# Altium PCB PCB1.PcbDoc
Units mm, origin at the board's own origin, x right, y up, seen from the top; angles counter-clockwise.
Board outline 74.17 x 27.94 mm, 2 copper layers (Top Layer, Bottom Layer); 12 components, 12 nets, 52 pads, 4 vias.
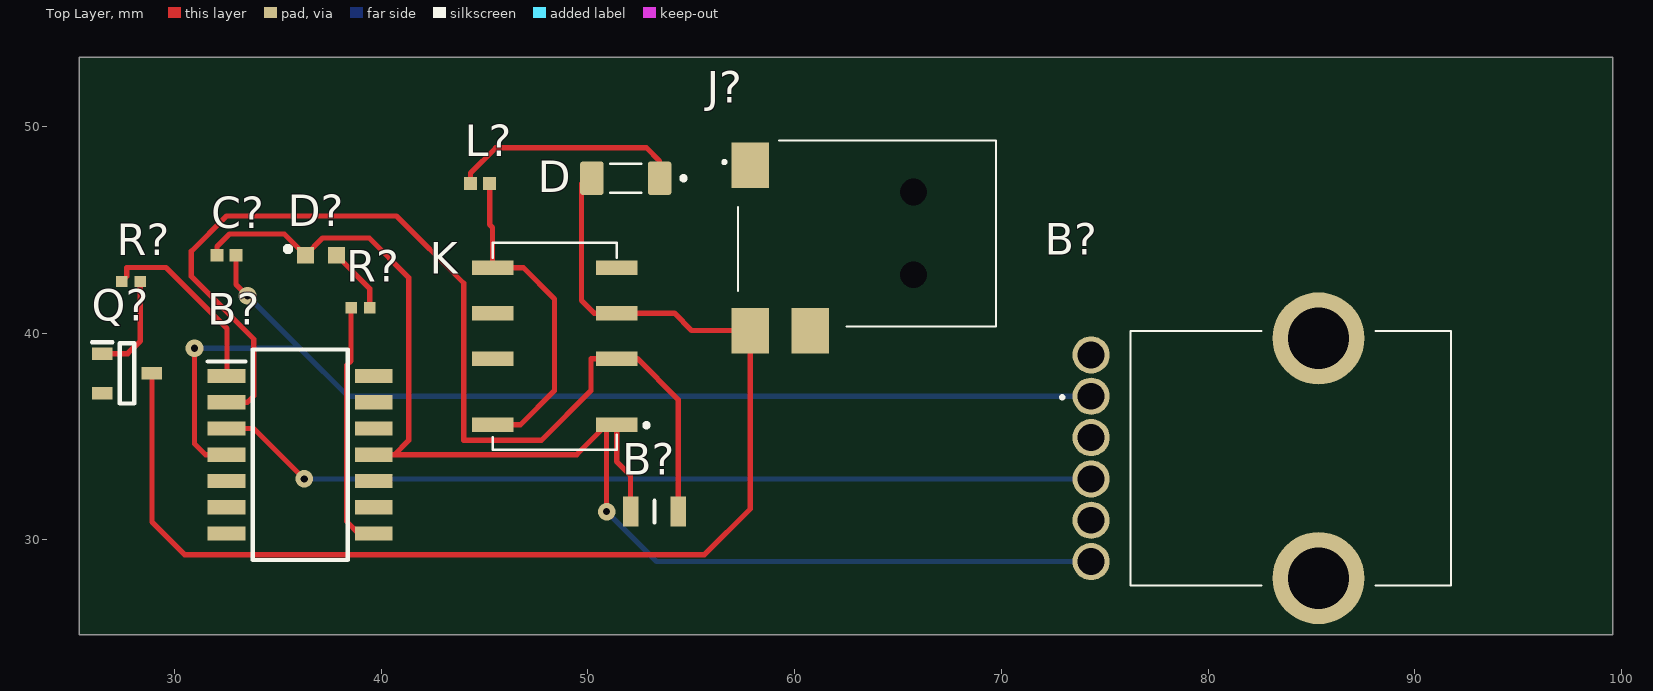
[diagram p0: Top Layer view]
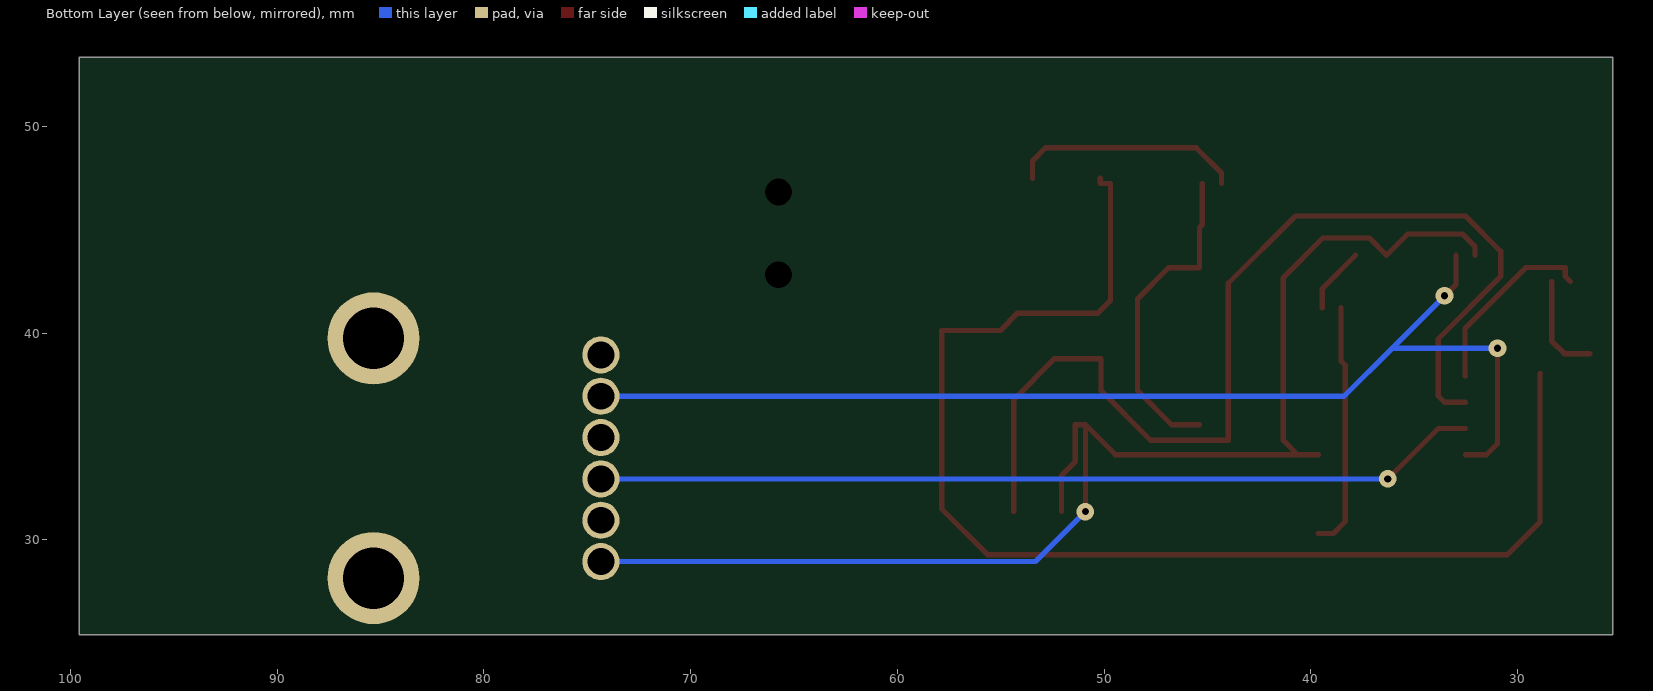
[diagram p1: Bottom Layer view, seen from below]
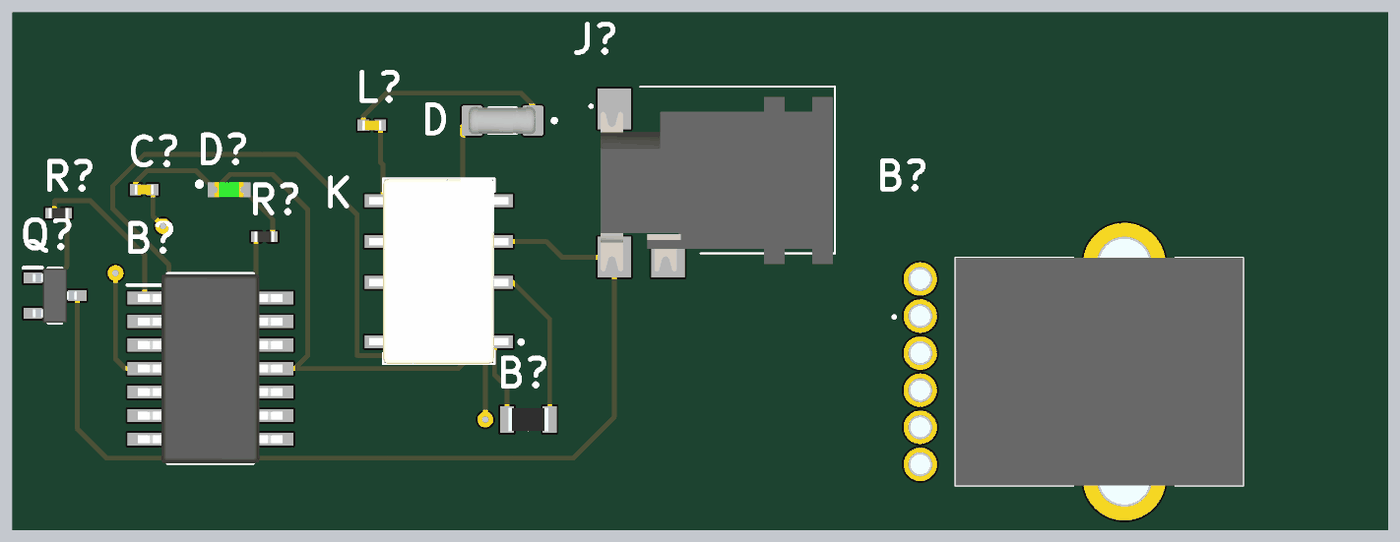
[diagram p2: 3D render of the assembled board from above, using the file's embedded part models]

## Layer stack, top to bottom
Top Solder: solder mask 0.0102, Solder Resist, Dk 3.5
Top Layer: signal copper 0.0356
Dielectric 1: dielectric 0.32, FR-4, Dk 4.8
Bottom Layer: signal copper 0.0356
Bottom Solder: solder mask 0.0102, Solder Resist, Dk 3.5

## Board outline
25.4,25.4 25.4,53.34 99.568,53.34 99.568,25.4

## Design rules (kind name [scope] priority, off if disabled: settings)
Clearance [All] p1: gap=0.254 ignorepadtopadclearanceinfootprint=FALSE except(0: Arc-Hole Track-Hole SMDPad-Hole THPad-Hole Via-Hole Fill-Hole Poly-Hole Region-Hole Text-Hole)
PolygonConnect [All] p1: connectstyle=Relief reliefconductorwidth=0.254 reliefentries=4 polygonreliefangle="90 Angle" airgapwidth=0.254
RoutingVias [All] p1: holewidth=0.711 width=1.27 viastyle="Through Hole" minholewidth=0.711 minwidth=1.27 maxholewidth=0.711 maxwidth=1.27
SolderMaskExpansion [All] p1: expansion=0.102 istentingtop=FALSE
SupplyNets "Schematic Supply Nets_2" [InNet('+5')] p1: voltage=0.000
SupplyNets "Schematic Supply Nets_1" [InNet('GND')] p2: voltage=0.000
SupplyNets "Schematic Supply Nets" [InNet('+12')] p3: voltage=0.000
Width [All] p1: maxlimit=0.254 minlimit=0.254 preferedwidth=0.254
30 further rules are at their usual default settings.

## Classes and differential pairs
component class "Circuit primaire": B? C? D D? J? K L? Q? R?

## Components (designator, comment, footprint, x,y, rotation, side; value= is the part's Value field where it differs from the comment)
B? "NB12K00103JBB" RESC2212X50N 53.213,31.369 r0 top
B? "PTV112-4420A-B104" PTV1124420AB104 74.344,36.951 r270 top
B? "LM324NSR" SOIC127P780X200-14N 36.079,34.12 r0 top
C? "Value" CAPC1005X06N 32.512,43.772 r0 top
D "FDLL4148" DIOMELF3414N 51.827,47.498 r180 top
D? "LED-GREEN" SMD-1608-LED 37.084,43.772 r0 top
J? "ADC-028-1-T/R" PJ1021SMTTR 63.5,44.831 r180 top
K "IM06GR" RELAY_IM06GR 48.387,39.37 r180 top
L? "Value" LQPC1005X06N 47.577,50.038 r0 top
Q? "BCW66GLT3G" SOT96P237X111-3N 27.697,38.057 r0 top
R? "1KΩ" RESC1005X06N 27.893,42.502 r0 top
R? "330 Ω" RESC1005X06N 38.989,41.232 r0 top

## Footprints (in the part's own frame and the unit in brackets; to place one, negate y for a bottom-side part, rotate by r counter-clockwise, add the part's x,y. Pads: shape width x height; smd on the part's side, far side on the other; paste and mask are expansions set on the pad)
CAPC1005X06N [mm] "Chip Capacitor, 2-Leads, Body 1,00x0,50mm, IPC Medium Density"
  rect 0.62x0.62 smd: 1(-0.46,0) 2(0.46,0)
  body extent -0.53,-0.28 0.53,0.28, height 0.55
DIOMELF3414N [mm]
  rrect25% 1.14x1.63 smd: A(1.64,0) C(-1.64,0)
  silkscreen extent -2.9,-0.7 0.75,0.7, body extent -1.78,-0.75 1.82,0.75, height 1.44
LQPC1005X06N [mm]
  rect 0.62x0.62 smd: 1(-3.254,-2.794) 2(-2.334,-2.794)
  body extent -3.32,-3.07 -2.27,-2.52, height 0.55
PJ1021SMTTR [mm]
  rect 1.8x2.2 smd: 1(5.65,-3.3) 2(2.75,4.7) 3(5.65,4.7)
  round 0.65 hole 1.3 unplated: MH1(-2.25,-2) MH2(-2.25,2)
  silkscreen extent -6.25,-4.5 6.95,4.5, body extent -6.12,-3.94 6.38,5.46, height 6.01
PTV1124420AB104 [mm]
  round 1.8 hole 1.3: A1(0,0) A2(-2,0) A3(8,0) B1(2,0) B2(4,0) B3(6,0)
  round 4.455 hole 2.97: MH1(-2.8,11) MH2(8.8,11)
  silkscreen extent -3.15,-1.45 9.15,17.4, body extent -4.17,-0.55 10.19,17.4, height 20.6
RELAY_IM06GR [mm]
  rect 2x0.7 smd: 1(-3,3.8) 2(-3,0.6) 3(-3,-1.6) 4(-3,-3.8) 5(3,-3.8) 6(3,-1.6) 7(3,0.6) 8(3,3.8)
  silkscreen extent -4.54,-5 3,5, body extent -3.75,-5 3.75,5, height 5.65
RESC1005X06N [mm] "Chip Resistor, 2-Leads, Body 1,00x0,50mm, IPC Medium Density"
  rect 0.55x0.55 smd: 1(-0.45,0) 2(0.45,0)
  body extent -0.53,-0.28 0.53,0.28, height 0.55
RESC2212X50N [mm]
  rect 0.75x1.45 smd: 1(-1.15,0) 2(1.15,0)
  silkscreen extent 0,-0.53 0,0.52, body extent -1.07,-0.63 1.07,0.63, height 0.5
SMD-1608-LED [mm]
  rect 0.8x0.8 smd paste+0 mask+0: 1(-0.75,0) 2(0.75,0)
  silkscreen extent -1.72,0.18 -1.47,0.42, body extent -1.25,-0.55 1.25,0.55, height 0.25
SOIC127P780X200-14N [mm]
  rect 1.825x0.7 smd: 1(-3.562,3.81) 2(-3.562,2.54) 3(-3.562,1.27) 4(-3.562,0) 5(-3.562,-1.27) 6(-3.562,-2.54) 7(-3.562,-3.81) 8(3.562,-3.81) 9(3.562,-2.54) 10(3.562,-1.27) 11(3.562,0) 12(3.562,1.27) 13(3.562,2.54) 14(3.562,3.81)
  silkscreen extent -4.47,-5.1 2.3,5.1, body extent -3.9,-5.1 3.9,5.1, height 2
SOT96P237X111-3N [mm]
  rect 1x0.6 smd: 1(-1.2,0.955) 2(-1.2,-0.955) 3(1.2,0)
  silkscreen extent -1.7,-1.46 0.35,1.51, body extent -1.18,-1.46 1.18,1.46, height 1.11

## Part data
B?: "NTC SMD Thermistor, NB12K, 10K, 5% AVX 10k 0805 Protection NTC Thermistor, 5s, 2 x 1.25 x 1.3mm", Manufacturer_Name="Kyocera AVX", Mouser Part Number=581-NB12K00103JBB, Arrow Part Number=NB12K00103JBB, Arrow Price/Stock=https://www.arrow.com/en/products/nb12k00103jbb/avx, Datasheet Link=https://datasheet.datasheetarchive.com/originals/distributors/Datasheets-DGA6/551314.pdf, Geometry.Height=0.5mm, Manufacturer_Part_Number=NB12K00103JBB, Mouser Price/Stock=https://www.mouser.co.uk/ProductDetail/AVX/NB12K00103JBB/?qs=4%252B6%252BTdINQeDPvI%252BQUQjJ3Q%3D%3D
B?: "Potentiometers PANEL CONTROL 100kOhm", Manufacturer_Name=Bourns, Mouser Part Number=652-PTV1124420AB104, Datasheet Link=https://www.bourns.com/docs/Product-Datasheets/PTVPTT.pdf, Geometry.Height=20.5mm, Manufacturer_Part_Number=PTV112-4420A-B104, Mouser Price/Stock=https://www.mouser.co.uk/ProductDetail/Bourns/PTV112-4420A-B104?qs=nqw9FAyaR8PT4wHHFlLdhA%3D%3D
B?: "Quadruple Operational Amplifier", Manufacturer_Name="Texas Instruments", Mouser Part Number=595-LM324NSR, Arrow Part Number=LM324NSR, Arrow Price/Stock=https://www.arrow.com/en/products/lm324nsr/texas-instruments?utm_currency=USD&region=nac, Datasheet Link=http://www.ti.com/lit/gpn/LM324, Geometry.Height=2mm, Manufacturer_Part_Number=LM324NSR, Mouser Price/Stock=https://www.mouser.co.uk/ProductDetail/Texas-Instruments/LM324NSR?qs=VBduBm9rCJQcjq4eh95DkA%3D%3D
C?: library part Capacitor
D: "Diode Standard 100V 200mA Surface Mount SOD-80", Package="SOD-80-2 ON Semiconductor", Digi-Key_Part_Number=FDLL4148CT-ND, DigiKey-Purchase-URL=https://snapeda.com/shop?store=DigiKey&id=2783433, MF="ON Semiconductor", Mouser-Purchase-URL=https://snapeda.com/shop?store=Mouser&id=2783433, MP=FDLL4148, SnapEDA_Link=https://www.snapeda.com/parts/FDLL4148/ON%20Semiconductor/view-part/2783433/?ref=snap
D?: "LED GREEN CLEAR CHIP SMD LTST-C190GKT", Case Code (Imperial)=0603, Case Code (Metric)=1608, Color=Green, Forward Current=30mA, Forward Voltage=2.1V, Lens Color=Colorless, Max Operating Temperature=85°C, Min Operating Temperature=-55°C, Package Quantity=1, Power Dissipation=100mW, Reverse Voltage=5V, Test Current=10mA, Voltage=2V, Case/Package=0603, Depth=0.8mm, Dominant Wavelength=569nm, Height=0.8mm, Illumination Color=Green, Lead Free="Lead Free", Length=1.6mm, Lens Style=Clear, Lens Transparency=Clear, Luminous Intensity=6mcd, Mount="Surface Mount", Number of Elements=1, Number of LEDs=1, Number of Pins=2, Packaging="Tape and Reel", Power Rating=100mW, Radiation Hardening=No, Viewing Angle=130°, Wavelength=565nm, Width=0.8mm
J?: "Connecteurs d'alimentation continue DC POWER JACK 2MM PIN TYPE 028", Manufacturer_Name="Same Sky", Mouser Part Number=737-ADC-028-1-T/R, Geometry.Height=6mm, Manufacturer_Part_Number=ADC-028-1-T/R, Mouser Price/Stock=https://www.mouser.fr/ProductDetail/Adam-Tech/ADC-028-1-T-R?qs=TTVbHWoAP%2FSiqsZeR9Co0Q%3D%3D
K: "Electromechanical Relay 12VDC 1.029KOhm 2A DPDT _10x7.5x5.65_mm SMD Signal Relay", Package=None, Availability=Unavailable, MF="TE Connectivity", MP=IM06GR, Price=None, SnapEDA_Link=https://www.snapeda.com/parts/IM06GR/TE%20Connectivity%20Potter%20%26%20Brumfield%20Relays/view-part/264147/?ref=snap, TE_purchase_URL=https://www.te.com/usa-en/product-2-1462037-3.html?te_bu=Cor&te_type=disp&te_campaign=seda_glo_cor-seda-global-disp-prtnr-fy19-seda-model-bom-cta_sma-317_1&elqCampaignId=32493
L?: library part Bobine
Q?: "NPN Bipolar Transistor", Manufacturer_Name=onsemi, Mouser Part Number=863-BCW66GLT3G, Arrow Part Number=BCW66GLT3G, Arrow Price/Stock=https://www.arrow.com/en/products/bcw66glt3g/on-semiconductor?region=europe, Datasheet Link=http://www.onsemi.com/pub/Collateral/BCW66GLT1-D.PDF, Geometry.Height=1.11mm, Manufacturer_Part_Number=BCW66GLT3G, Mouser Price/Stock=https://www.mouser.co.uk/ProductDetail/onsemi/BCW66GLT3G?qs=XfkxeqX9xWXeTiewInI3Nw%3D%3D
R? R?: library part Resistor

## Via types
v1: diameter 0.85, hole 0.35, Top Layer to Bottom Layer, 4 vias

## Nets (pads, with @x,y where several pads share a name; then routed paths per layer and width w, separated by ;. In a path a pad name is that pad's centre, name@x,y a point inside that pad or via, vN(x,y) a via of type N, cw(c..) or ccw(c..) an arc to the next point about the centre after c; other vN are vias at no path point)
+5: B?.4 B?.A1 C?.2 | length 56.5
  Top Layer w0.254: v1(30.963,39.268) 30.963,34.653 31.496,34.12 B?.4 ; C?.2 32.972,42.364 v1(33.528,41.808)
  Bottom Layer w0.254: v1(30.963,39.268) 36.068,39.268 ; v1(33.528,41.808) 36.068,39.268 ; B?.A1 38.385,36.951 36.068,39.268
+12: J?.2
GND: B?.1@52.063,31.369 B?.11 B?.A3 C?.1 D?.1 K.1 | length 65.8
  Top Layer w0.254: C?.1 32.052,44.196 32.656,44.8 35.306,44.8 D?.1 37.164,44.602 39.421,44.602 41.326,42.697 41.326,34.806 40.64,34.12 ; B?.11 40.64,34.12 ; v1(50.902,31.369) K.1@50.902,35.57 ; B?.1@52.063,31.369 52.063,33.122 51.387,33.798 K.1 K.1@50.902,35.57 ; 40.64,34.12 49.452,34.12 K.1@50.902,35.57
  Bottom Layer w0.254: v1(50.902,31.369) 53.32,28.951 B?.A3
NetB?_1: B?.1@32.517,37.93 R?.1@27.443,42.502 | length 9.2
  Top Layer w0.254: R?.1@27.443,42.502 27.686,42.745 27.686,43.18 29.591,43.18 32.537,40.234 32.537,37.93 B?.1@32.517,37.93
NetB?_2: B?.2 K.2 | length 51.7
  Top Layer w0.254: B?.2@32.517,36.66 33.528,36.66 33.833,36.965 33.833,39.726 30.81,42.748 30.81,43.967 32.512,45.669 40.742,45.669 43.993,42.418 43.993,34.823 47.752,34.823 50.149,37.221 50.149,38.77 K.2 52.391,38.77 54.363,36.798 B?.2@54.363,31.369
NetB?_3: B?.3 B?.B2 | length 42.8
  Top Layer w0.254: B?.3 33.833,35.39 v1(36.272,32.951)
  Bottom Layer w0.254: v1(36.272,32.951) B?.B2
NetB?_8: B?.8 R?.1@38.539,41.232 | length 12
  Top Layer w0.254: R?.1@38.539,41.232 38.539,38.659 38.329,38.448 38.329,30.886 38.905,30.31 B?.8
NetD?_2: D?.2 R?.2@39.439,41.232 | length 3.2
  Top Layer w0.254: D?.2 39.439,42.167 R?.2@39.439,41.232
NetD_A: D.A J?.3 K.3 Q?.3 | length 61.5
  Top Layer w0.254: Q?.3 28.905,38.057 28.905,30.861 30.48,29.286 55.64,29.286 57.85,31.496 J?.3 55.017,40.131 54.178,40.97 K.3 50.292,40.97 49.682,41.58 49.682,47.244 50.187,47.244 D.A
NetD_C: D.C L?.1 | length 11.3
  Top Layer w0.254: L?.1 44.323,47.752 45.542,48.971 52.832,48.971 53.467,48.336 D.C
NetK_5: K.5 K.8 L?.2 | length 15.9
  Top Layer w0.254: L?.2 45.243,45.254 45.387,45.11 K.5 46.873,43.17 48.387,41.656 48.387,37.221 46.736,35.57 K.8
NetQ?_1: Q?.1 R?.2@28.343,42.502 | length 5
  Top Layer w0.254: Q?.1 27.731,39.012 28.343,39.624 R?.2@28.343,42.502
pads on no net: B?.5 B?.6 B?.7 B?.9 B?.10 B?.12 B?.13 B?.14 B?.A2 B?.B1 B?.B3 B?.MH1 B?.MH2 J?.1 J?.MH1 J?.MH2 K.4 K.6 K.7 Q?.2

## Silkscreen, mask and mechanical layers (free items; w line width, h text height)
Mechanical 1:
  the board outline again, w0.254

## Dimensions
24.384,53.34 to 23.622,25.4 on Multi-Layer
25.4,25.4 to 99.568,25.4 on Multi-Layer